# Altium PCB MechanicalLayout-LogitechG502.pcbdoc
Units mil, origin at the board's own origin, x right, y up, seen from the top; angles counter-clockwise.
Board outline 3690.8 x 4200.6 mil, 2 copper layers (Top Layer, Bottom Layer), stack 2.8 mil thick; 13 components, 1 nets, 73 pads, 117 vias.
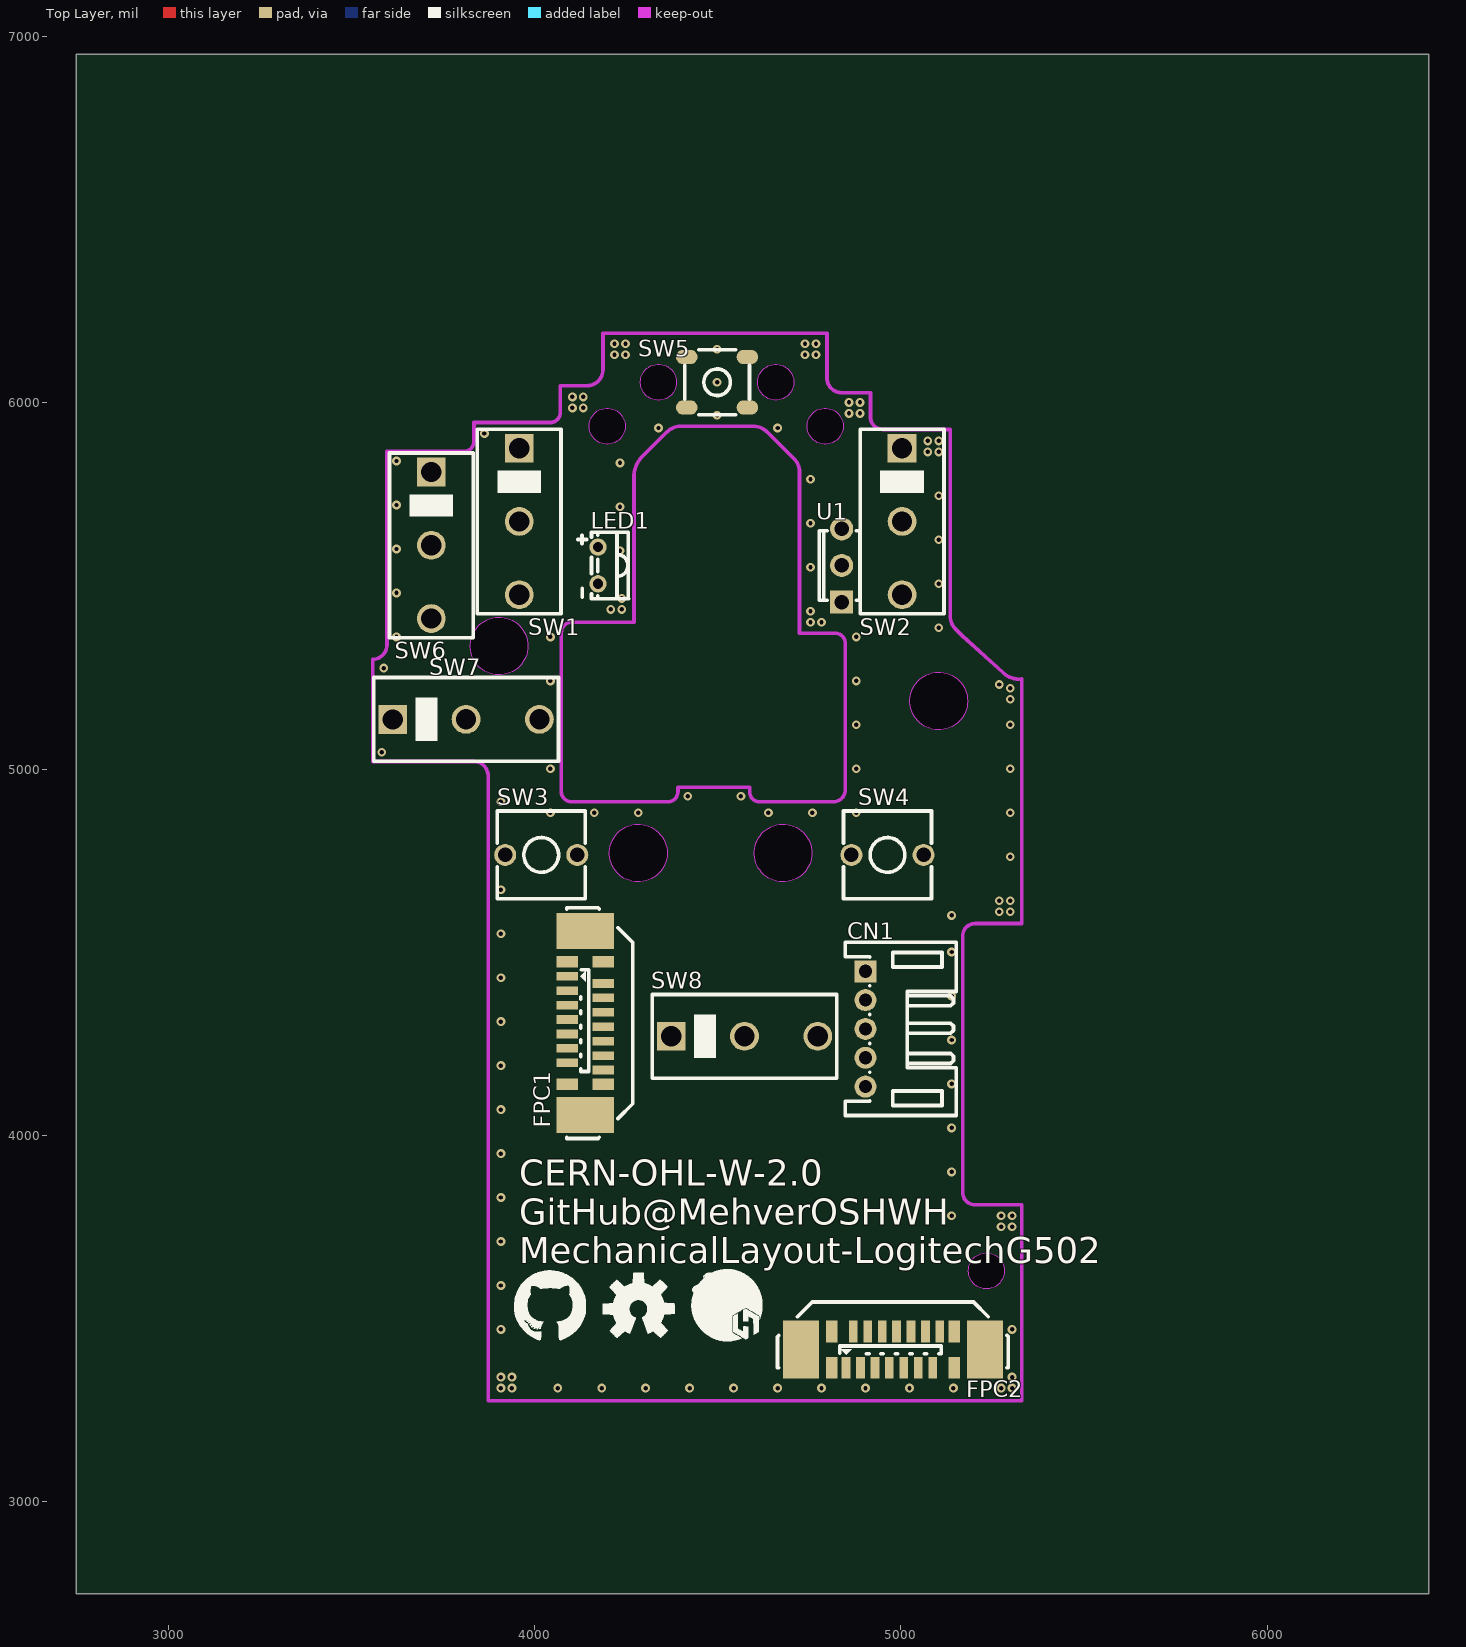
[diagram p0: Top Layer view]
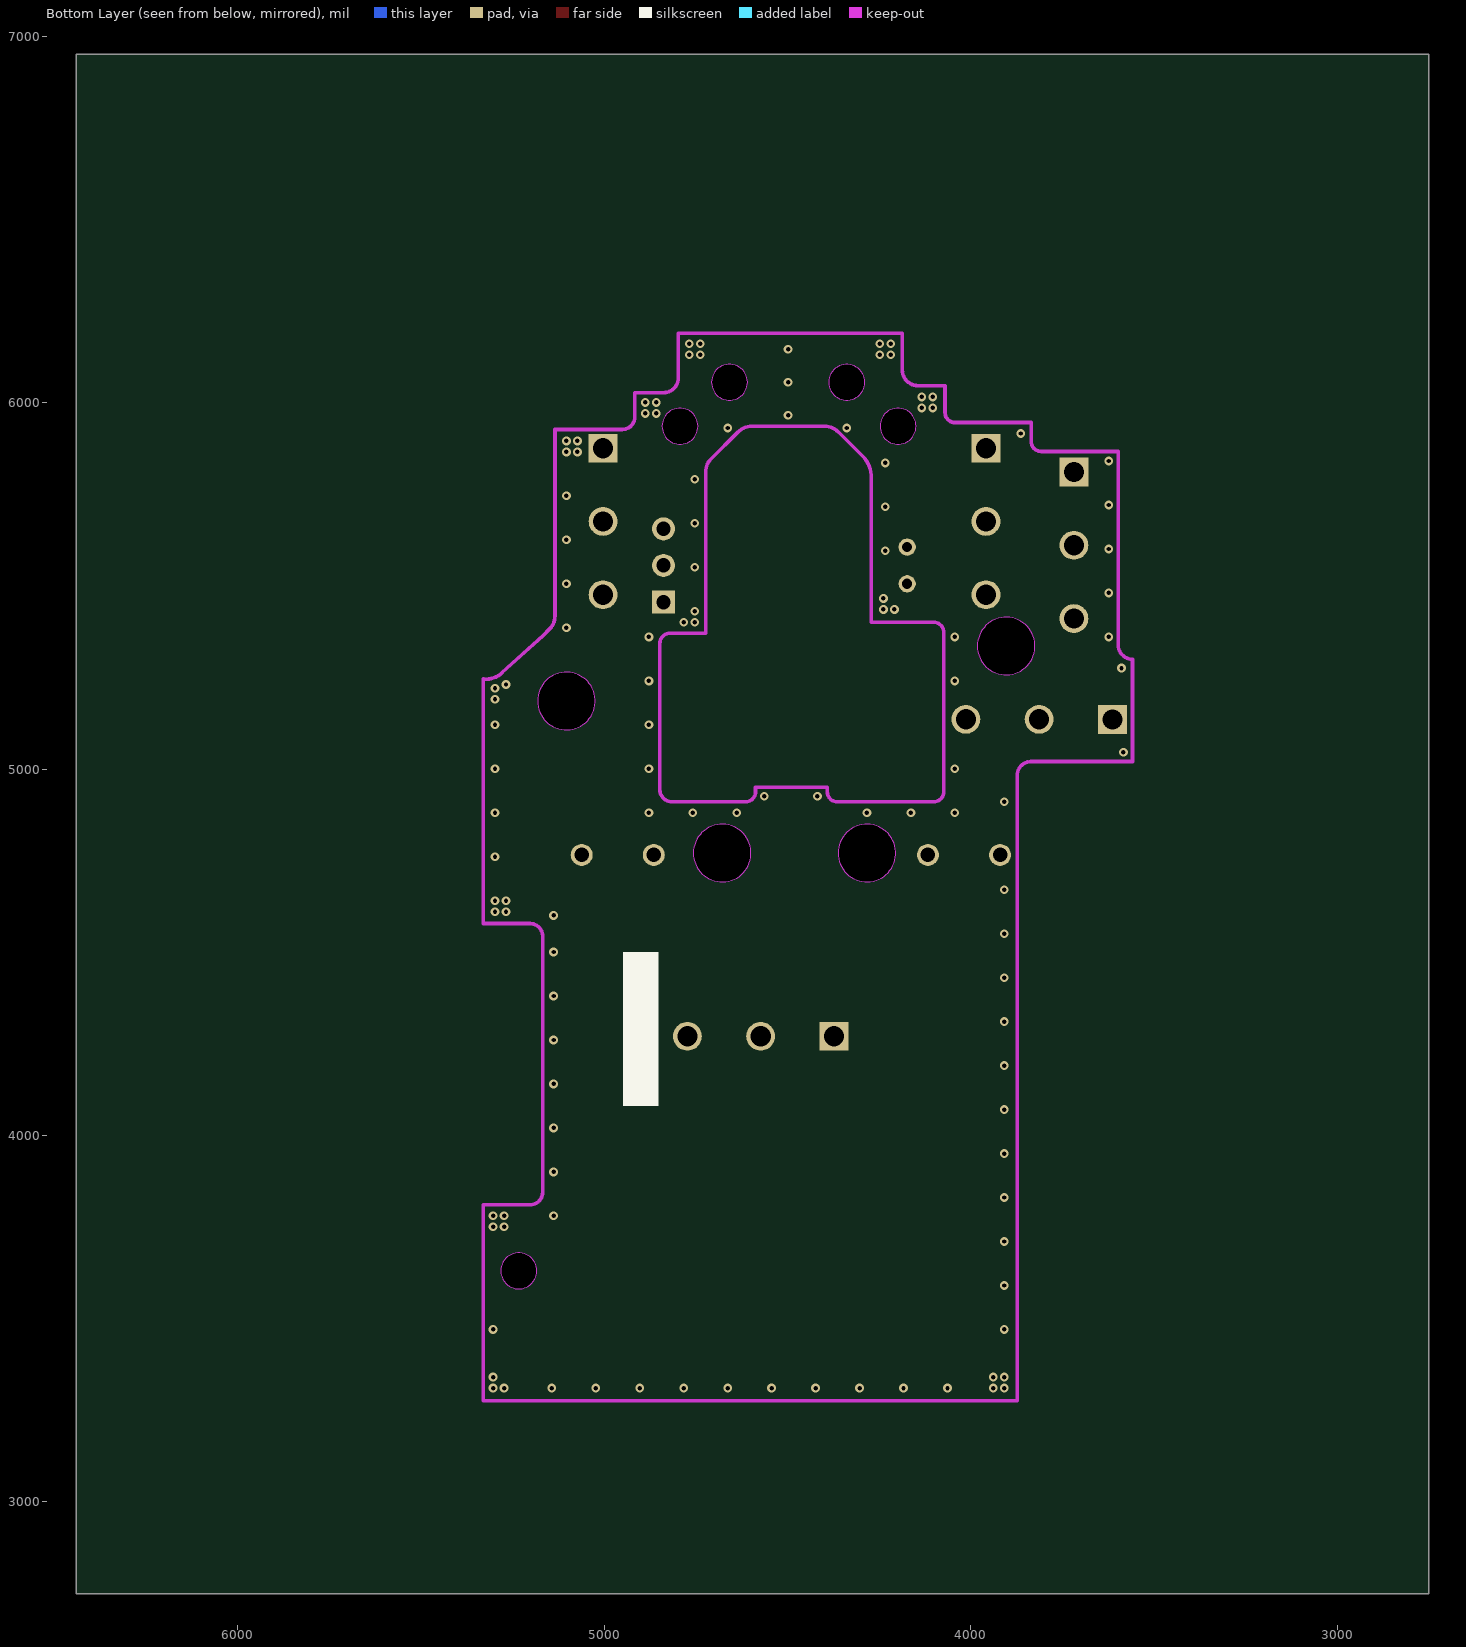
[diagram p1: Bottom Layer view, seen from below]

## Layer stack, top to bottom
Top Solder Mask Layer: solder mask 0.4, Dk 3.3
Top Layer: signal copper 1.4
Bottom Layer: signal copper 1.4
Bottom Solder Mask Layer: solder mask 0.4, Dk 3.3

## Board outline
6440.8,2750 2750,2750 2750,6950.6 6440.8,6950.6
cut-out: 3982.2,5335.9 3981.8,5328.1 3980.7,5320.3 3978.7,5312.7 3976,5305.3 3972.6,5298.2 3968.5,5291.6 3963.8,5285.3 3958.5,5279.5 3952.6,5274.3 3946.2,5269.8 3939.4,5265.8 3932.3,5262.6 3924.8,5260.1 3917.2,5258.4 3909.4,5257.4 3901.5,5257.2 3893.7,5257.8 3886,5259.1 3878.4,5261.3 3871.1,5264.1 3864.1,5267.7 3857.5,5272 3851.4,5276.9 3845.8,5282.4 3840.7,5288.4 3836.3,5294.8 3832.5,5301.7 3829.5,5309 3827.2,5316.5 3825.6,5324.2 3824.8,5332 3824.8,5339.8 3825.6,5347.6 3827.2,5355.3 3829.5,5362.8 3832.5,5370.1 3836.3,5377 3840.7,5383.5 3845.8,5389.5 3851.4,5394.9 3857.5,5399.8 3864.1,5404.1 3871.1,5407.7 3878.4,5410.5 3886,5412.7 3893.7,5414 3901.5,5414.6 3909.4,5414.4 3917.2,5413.5 3924.8,5411.7 3932.3,5409.2 3939.4,5406 3946.2,5402.1 3952.6,5397.5 3958.5,5392.3 3963.8,5386.5 3968.5,5380.3 3972.6,5373.6 3976,5366.5 3978.7,5359.1 3980.7,5351.5 3981.8,5343.7
cut-out: 4362.2,4770.9 4361.8,4763.1 4360.7,4755.3 4358.7,4747.7 4356,4740.3 4352.6,4733.2 4348.5,4726.6 4343.8,4720.3 4338.5,4714.5 4332.6,4709.3 4326.2,4704.8 4319.4,4700.8 4312.3,4697.6 4304.8,4695.1 4297.2,4693.4 4289.4,4692.4 4281.5,4692.2 4273.7,4692.8 4266,4694.1 4258.4,4696.3 4251.1,4699.1 4244.1,4702.7 4237.5,4707 4231.4,4711.9 4225.8,4717.4 4220.7,4723.4 4216.3,4729.8 4212.5,4736.7 4209.5,4744 4207.2,4751.5 4205.6,4759.2 4204.8,4767 4204.8,4774.8 4205.6,4782.6 4207.2,4790.3 4209.5,4797.8 4212.5,4805.1 4216.3,4812 4220.7,4818.5 4225.8,4824.5 4231.4,4829.9 4237.5,4834.8 4244.1,4839.1 4251.1,4842.7 4258.4,4845.5 4266,4847.7 4273.7,4849 4281.5,4849.6 4289.4,4849.4 4297.2,4848.5 4304.8,4846.7 4312.3,4844.2 4319.4,4841 4326.2,4837.1 4332.6,4832.5 4338.5,4827.3 4343.8,4821.5 4348.5,4815.3 4352.6,4808.6 4356,4801.5 4358.7,4794.1 4360.7,4786.5 4361.8,4778.7
cut-out: 4757.2,4770.9 4756.8,4763.1 4755.7,4755.3 4753.7,4747.7 4751,4740.3 4747.6,4733.2 4743.5,4726.6 4738.8,4720.3 4733.5,4714.5 4727.6,4709.3 4721.2,4704.8 4714.4,4700.8 4707.3,4697.6 4699.8,4695.1 4692.2,4693.4 4684.4,4692.4 4676.5,4692.2 4668.7,4692.8 4661,4694.1 4653.4,4696.3 4646.1,4699.1 4639.1,4702.7 4632.5,4707 4626.4,4711.9 4620.8,4717.4 4615.7,4723.4 4611.3,4729.8 4607.5,4736.7 4604.5,4744 4602.2,4751.5 4600.6,4759.2 4599.8,4767 4599.8,4774.8 4600.6,4782.6 4602.2,4790.3 4604.5,4797.8 4607.5,4805.1 4611.3,4812 4615.7,4818.5 4620.8,4824.5 4626.4,4829.9 4632.5,4834.8 4639.1,4839.1 4646.1,4842.7 4653.4,4845.5 4661,4847.7 4668.7,4849 4676.5,4849.6 4684.4,4849.4 4692.2,4848.5 4699.8,4846.7 4707.3,4844.2 4714.4,4841 4721.2,4837.1 4727.6,4832.5 4733.5,4827.3 4738.8,4821.5 4743.5,4815.3 4747.6,4808.6 4751,4801.5 4753.7,4794.1 4755.7,4786.5 4756.8,4778.7
cut-out: 5182.2,5185.9 5181.8,5178.1 5180.7,5170.3 5178.7,5162.7 5176,5155.3 5172.6,5148.2 5168.5,5141.6 5163.8,5135.3 5158.5,5129.5 5152.6,5124.3 5146.2,5119.8 5139.4,5115.8 5132.3,5112.6 5124.8,5110.1 5117.2,5108.4 5109.4,5107.4 5101.5,5107.2 5093.7,5107.8 5086,5109.1 5078.4,5111.3 5071.1,5114.1 5064.1,5117.7 5057.5,5122 5051.4,5126.9 5045.8,5132.4 5040.7,5138.4 5036.3,5144.8 5032.5,5151.7 5029.5,5159 5027.2,5166.5 5025.6,5174.2 5024.8,5182 5024.8,5189.8 5025.6,5197.6 5027.2,5205.3 5029.5,5212.8 5032.5,5220.1 5036.3,5227 5040.7,5233.5 5045.8,5239.5 5051.4,5244.9 5057.5,5249.8 5064.1,5254.1 5071.1,5257.7 5078.4,5260.5 5086,5262.7 5093.7,5264 5101.5,5264.6 5109.4,5264.4 5117.2,5263.5 5124.8,5261.7 5132.3,5259.2 5139.4,5256 5146.2,5252.1 5152.6,5247.5 5158.5,5242.3 5163.8,5236.5 5168.5,5230.3 5172.6,5223.6 5176,5216.5 5178.7,5209.1 5180.7,5201.5 5181.8,5193.7
cut-out: 4247.7,5935.9 4247.3,5929.7 4246.2,5923.7 4244.2,5917.8 4241.6,5912.2 4238.3,5907 4234.4,5902.2 4229.9,5898 4224.9,5894.4 4219.4,5891.4 4213.7,5889.1 4207.7,5887.6 4201.6,5886.8 4195.4,5886.8 4189.3,5887.6 4183.3,5889.1 4177.5,5891.4 4172.1,5894.4 4167.1,5898 4162.6,5902.2 4158.7,5907 4155.4,5912.2 4152.7,5917.8 4150.8,5923.7 4149.7,5929.7 4149.3,5935.9 4149.7,5942.1 4150.8,5948.1 4152.7,5954 4155.4,5959.6 4158.7,5964.8 4162.6,5969.6 4167.1,5973.8 4172.1,5977.5 4177.5,5980.4 4183.3,5982.7 4189.3,5984.2 4195.4,5985 4201.6,5985 4207.7,5984.2 4213.7,5982.7 4219.4,5980.4 4224.9,5977.5 4229.9,5973.8 4234.4,5969.6 4238.3,5964.8 4241.6,5959.6 4244.2,5954 4246.2,5948.1 4247.3,5942.1
cut-out: 4387.7,6055.9 4387.3,6049.7 4386.2,6043.7 4384.2,6037.8 4381.6,6032.2 4378.3,6027 4374.4,6022.2 4369.9,6018 4364.9,6014.4 4359.4,6011.4 4353.7,6009.1 4347.7,6007.6 4341.6,6006.8 4335.4,6006.8 4329.3,6007.6 4323.3,6009.1 4317.5,6011.4 4312.1,6014.4 4307.1,6018 4302.6,6022.2 4298.7,6027 4295.4,6032.2 4292.7,6037.8 4290.8,6043.7 4289.7,6049.7 4289.3,6055.9 4289.7,6062.1 4290.8,6068.1 4292.7,6074 4295.4,6079.6 4298.7,6084.8 4302.6,6089.6 4307.1,6093.8 4312.1,6097.5 4317.5,6100.4 4323.3,6102.7 4329.3,6104.2 4335.4,6105 4341.6,6105 4347.7,6104.2 4353.7,6102.7 4359.4,6100.4 4364.9,6097.5 4369.9,6093.8 4374.4,6089.6 4378.3,6084.8 4381.6,6079.6 4384.2,6074 4386.2,6068.1 4387.3,6062.1
cut-out: 4707.7,6055.9 4707.3,6049.7 4706.2,6043.7 4704.2,6037.8 4701.6,6032.2 4698.3,6027 4694.4,6022.2 4689.9,6018 4684.9,6014.4 4679.4,6011.4 4673.7,6009.1 4667.7,6007.6 4661.6,6006.8 4655.4,6006.8 4649.3,6007.6 4643.3,6009.1 4637.5,6011.4 4632.1,6014.4 4627.1,6018 4622.6,6022.2 4618.7,6027 4615.4,6032.2 4612.7,6037.8 4610.8,6043.7 4609.7,6049.7 4609.3,6055.9 4609.7,6062.1 4610.8,6068.1 4612.7,6074 4615.4,6079.6 4618.7,6084.8 4622.6,6089.6 4627.1,6093.8 4632.1,6097.5 4637.5,6100.4 4643.3,6102.7 4649.3,6104.2 4655.4,6105 4661.6,6105 4667.7,6104.2 4673.7,6102.7 4679.4,6100.4 4684.9,6097.5 4689.9,6093.8 4694.4,6089.6 4698.3,6084.8 4701.6,6079.6 4704.2,6074 4706.2,6068.1 4707.3,6062.1
cut-out: 4842.7,5935.9 4842.3,5929.7 4841.2,5923.7 4839.2,5917.8 4836.6,5912.2 4833.3,5907 4829.4,5902.2 4824.9,5898 4819.9,5894.4 4814.4,5891.4 4808.7,5889.1 4802.7,5887.6 4796.6,5886.8 4790.4,5886.8 4784.3,5887.6 4778.3,5889.1 4772.5,5891.4 4767.1,5894.4 4762.1,5898 4757.6,5902.2 4753.7,5907 4750.4,5912.2 4747.7,5917.8 4745.8,5923.7 4744.7,5929.7 4744.3,5935.9 4744.7,5942.1 4745.8,5948.1 4747.7,5954 4750.4,5959.6 4753.7,5964.8 4757.6,5969.6 4762.1,5973.8 4767.1,5977.5 4772.5,5980.4 4778.3,5982.7 4784.3,5984.2 4790.4,5985 4796.6,5985 4802.7,5984.2 4808.7,5982.7 4814.4,5980.4 4819.9,5977.5 4824.9,5973.8 4829.4,5969.6 4833.3,5964.8 4836.6,5959.6 4839.2,5954 4841.2,5948.1 4842.3,5942.1
cut-out: 5282.7,3630.9 5282.3,3624.7 5281.2,3618.7 5279.2,3612.8 5276.6,3607.2 5273.3,3602 5269.4,3597.2 5264.9,3593 5259.9,3589.4 5254.4,3586.4 5248.7,3584.1 5242.7,3582.6 5236.6,3581.8 5230.4,3581.8 5224.3,3582.6 5218.3,3584.1 5212.5,3586.4 5207.1,3589.4 5202.1,3593 5197.6,3597.2 5193.7,3602 5190.4,3607.2 5187.7,3612.8 5185.8,3618.7 5184.7,3624.7 5184.3,3630.9 5184.7,3637.1 5185.8,3643.1 5187.7,3649 5190.4,3654.6 5193.7,3659.8 5197.6,3664.6 5202.1,3668.8 5207.1,3672.5 5212.5,3675.4 5218.3,3677.7 5224.3,3679.2 5230.4,3680 5236.6,3680 5242.7,3679.2 5248.7,3677.7 5254.4,3675.4 5259.9,3672.5 5264.9,3668.8 5269.4,3664.6 5273.3,3659.8 5276.6,3654.6 5279.2,3649 5281.2,3643.1 5282.3,3637.1

## Design rules (kind name [scope] priority, off if disabled: settings)
BoardOutlineClearance Default [All] p0: genericclearance=10 ignorepadtopadclearanceinfootprint=FALSE except(0: Arc-SplitContinuation Track-SplitContinuation SMDPad-SplitContinuation THPad-SplitContinuation Via-SplitContinuation Fill-SplitContinuation Poly-SplitContinuation Region-SplitContinuation Text-SplitContinuation)
BoardOutlineClearance otherClearance [All] p0: genericclearance=10 ignorepadtopadclearanceinfootprint=FALSE except(0: Arc-SplitContinuation Track-SplitContinuation SMDPad-SplitContinuation THPad-SplitContinuation Via-SplitContinuation Fill-SplitContinuation Poly-SplitContinuation Region-SplitContinuation Text-SplitContinuation)
Clearance Default [All] p1: gap=7 ignorepadtopadclearanceinfootprint=FALSE
Clearance otherClearance [All] p1: gap=7 ignorepadtopadclearanceinfootprint=FALSE
DiffPairsRouting differentialPair [All] p1: maxuncoupledlength=10 minlimit=5 maxlimit=Infinity mostfreqgap=6 toplayer_minwidth=5 toplayer_prefwidth=100 toplayer_maxwidth=100 bottomlayer_minwidth=5 bottomlayer_prefwidth=100 bottomlayer_maxwidth=100
PasteMaskExpansion pasteMaskExpansion [All] p1: expansion=0
PlaneConnect innerPlane [All] p1: planeconnectstyle=Relief reliefexpansion=20 reliefentries=4 reliefconductorwidth=10 reliefairgap=10
PolygonConnect copperRegion [All] p1: connectstyle=Relief reliefentries=4 reliefconductorwidth=10 polygonreliefangle="90 Angle" airgapwidth=10
RoutingVias Default [All] p1: viastyle="Through Hole" holewidth=12 minholewidth=12 maxholewidth=1181 width=12 minwidth=12 maxwidth=1181
SolderMaskExpansion Common [IsVia] p1: useseparateexpansions=TRUE expansion=-1000 expansionbottom=-1000
SolderMaskExpansion Common [All] p2: useseparateexpansions=TRUE expansion=2 expansionbottom=2
Width Default [All] p1: maxlimit=1000 minlimit=10 preferedwidth=10

## Components (designator, comment, footprint, x,y, rotation, side; value= is the part's Value field where it differs from the comment)
CN1 "PH-5AWD" CONN-TH_5P-P2.00_PH-5AWD 4903.5,4290.9 r270 top
FPC1 "FPC-0.5AZD2-14PLCR5-H42" FPC-SMD_14P-P1.00_FPC-0.5AZD2-14PLCR5-H42#1 4138.5,4306.9 r270 top
FPC2 "FPC-0.5AZD2-14PLCR5-H42" FPC-SMD_14P-P1.00_FPC-0.5AZD2-14PLCR5-H42#2 4978.5,3415.9 r0 top
LED1 "XL-IR928-6C" LED-TH_L4.6-W2.5-P2.54_IR928-6C 4173.5,5555.9 r90 top
SW1 "D2F-F" SW-TH_D2F-F#1 3958.5,5675.9 r270 top
SW2 "D2F-F" SW-TH_D2F-F#1 5003.5,5675.9 r270 top
SW3 "HX TS6673Z2J JYSB" SW-TH_L6.2-W6.2-P5.00 4018.5,4765.9 r0 top
SW4 "HX TS6673Z2J JYSB" SW-TH_L6.2-W6.2-P5.00 4963.5,4765.9 r0 top
SW5 "K2-1824SR-B4SW-06" SW-SMD_4P-L4.5-W4.5-P3.50-LS5.0 4498.5,6055.9 r0 top
SW6 "D2F-F" SW-TH_D2F-F#1 3718.5,5610.9 r270 top
SW7 "D2F-F" SW-TH_D2F-F#2 3813.5,5135.9 r0 top
SW8 "D2F-F" SW-TH_D2F-F#3 4573.4,4271 r0 top
U1 "PT2559B/L2/H2(A5)" OPTO-TH_3P_PT2559B 4838.5,5555.9 r90 top

## Footprints (in the part's own frame and the unit in brackets; to place one, negate y for a bottom-side part, rotate by r counter-clockwise, add the part's x,y. Pads: shape width x height; smd on the part's side, far side on the other; paste and mask are expansions set on the pad)
CONN-TH_5P-P2.00_PH-5AWD [mil]
  rect 60x60 hole 36: 1(-157.5,0)
  round 60 hole 36: 2(-78.8,0) 3(-0.1,0) 4(78.6,0) 5(157.4,0)
  silkscreen extent -236,-55 236,248
FPC-SMD_14P-P1.00_FPC-0.5AZD2-14PLCR5-H42#1 [mil]
  rect 23.6x59.1 smd paste+0 mask+2: 1(-127.9,-49.2) 2(-108.2,49.2) 3(-88.5,-49.2) 4(-68.9,49.2) 5(-49.2,-49.2) 6(-29.5,49.2) 7(-9.8,-49.2) 8(9.9,49.2) 9(29.6,-49.2) 10(49.3,49.2) 11(68.9,-49.2) 12(88.6,49.2) 13(108.3,-49.2) 14(128,49.2)
  rect 31.5x59.1 smd paste+0 mask+2: 15(167.4,49.2) 16(167.4,-49.2) 17(-167.3,49.2) 18(-167.3,-49.2)
  rect 98.4x157.5 smd paste+0 mask+2: 15(251.3,0) 17(-251.2,0)
  silkscreen extent -315,-50 315,130
FPC-SMD_14P-P1.00_FPC-0.5AZD2-14PLCR5-H42#2 [mil]
  rect 23.6x59.1 smd paste+0 mask+2: 1(-128,-49.2) 2(-108.3,49.2) 3(-88.6,-49.2) 4(-68.9,49.2) 5(-49.2,-49.2) 6(-29.5,49.2) 7(-9.9,-49.2) 8(9.8,49.2) 9(29.5,-49.2) 10(49.2,49.2) 11(68.9,-49.2) 12(88.6,49.2) 13(108.2,-49.2) 14(127.9,49.2)
  rect 31.5x59.1 smd paste+0 mask+2: 15(167.3,49.2) 16(167.3,-49.2) 17(-167.3,49.2) 18(-167.3,-49.2)
  rect 98.4x157.5 smd paste+0 mask+2: 15(251.2,0) 17(-251.2,0)
  silkscreen extent -315,-50 315,130
LED-TH_L4.6-W2.5-P2.54_IR928-6C [mil]
  round 47.2 hole 27.6: 1(-50,0) 2(50,0)
  silkscreen extent -90,-83 91,55
OPTO-TH_3P_PT2559B [mil]
  rect 63x63 hole 39.4: 1(-100,0)
  round 63 hole 39.4: 2(0,0) 3(100,0)
  silkscreen extent -94,-49 94,61
SW-SMD_4P-L4.5-W4.5-P3.50-LS5.0 [mil]
  oval 59.1x39.4 smd: 1(-82.7,68.9) 2(82.7,68.9) 3(-82.7,-68.9) 4(82.7,-68.9)
  silkscreen extent -89,-89 89,89
SW-TH_D2F-F#1 [mil]
  rect 78.7x78.7 hole 55.1: 1(-200,-0.1)
  round 78.7 hole 55.1: 2(-0.1,0) 3(199.9,0)
  silkscreen extent -252,-114 252,114
SW-TH_D2F-F#2 [mil]
  rect 78.7x78.7 hole 55.1: 1(-200,0)
  round 78.7 hole 55.1: 2(-0.1,0.1) 3(199.9,0.1)
  silkscreen extent -252,-114 252,114
SW-TH_D2F-F#3 [mil]
  rect 78.7x78.7 hole 55.1: 1(-199.9,-0.1)
  round 78.7 hole 55.1: 2(0,0) 3(200,0)
  silkscreen extent -252,-114 252,114
SW-TH_L6.2-W6.2-P5.00 [mil]
  round 60 hole 39.4: 1(-98.4,0) 2(98.4,0)
  silkscreen extent -120,-120 120,120

## Via types
v1: diameter 24, hole 12, Top Layer to Bottom Layer, 117 vias

## Nets (pads, with @x,y where several pads share a name; then routed paths per layer and width w, separated by ;. In a path a pad name is that pad's centre, name@x,y a point inside that pad or via, vN(x,y) a via of type N, cw(c..) or ccw(c..) an arc to the next point about the centre after c; other vN are vias at no path point)
GND: 
  other v1: 3908.5,3310.9 3938.5,3310.9 4063.5,3310.9 4183.5,3310.9 4303.5,3310.9 4423.5,3310.9 4543.5,3310.9 4663.5,3310.9 4783.5,3310.9 4903.5,3310.9 5023.5,3310.9 5143.5,3310.9 5273.5,3310.9 5303.5,3310.9 3908.5,3340.9 3938.5,3340.9 5303.5,3340.9 3908.5,3470.9 5303.5,3470.9 3908.5,3590.9 3908.5,3710.9 5273.5,3750.9 5303.5,3750.9 5138.5,3780.9 5273.5,3780.9 5303.5,3780.9 3908.5,3830.9 5138.5,3900.9 3908.5,3950.9 5138.5,4020.9 3908.5,4070.9 5138.5,4140.9 3908.5,4190.9 5138.5,4260.9 3908.5,4310.9 5138.5,4380.9 3908.5,4430.9 5138.5,4500.9 3908.5,4550.9 5138.5,4600.9 5268.5,4610.9 5298.5,4610.9 5268.5,4640.9 5298.5,4640.9 3908.5,4670.9 5298.5,4760.9 4043.5,4880.9 4163.5,4880.9 4283.5,4880.9 4638.5,4880.9 4758.5,4880.9 4878.5,4880.9 5298.5,4880.9 3908.5,4910.9 4418.5,4925.9 4563.5,4925.9 4043.5,5000.9 4878.5,5000.9 5298.5,5000.9 3583.5,5045.9 4878.5,5120.9 5298.5,5120.9 5298.5,5190.9 5298.5,5220.9 5268.5,5230.9 4043.5,5240.9 4878.5,5240.9 3588.5,5275.9 3623.5,5360.9 4043.5,5360.9 4878.5,5360.9 5103.5,5385.9 4753.5,5400.9 4783.5,5400.9 4753.5,5430.9 4208.5,5435.9 4238.5,5435.9 4238.5,5465.9 3623.5,5480.9 5103.5,5505.9 4753.5,5550.9 4233.5,5595.9 3623.5,5600.9 5103.5,5625.9 4753.5,5670.9 4233.5,5715.9 3623.5,5720.9 5103.5,5745.9 4753.5,5790.9 4233.5,5835.9 3623.5,5840.9 5073.5,5865.9 5103.5,5865.9 5073.5,5895.9 5103.5,5895.9 3863.5,5915.9 4338.5,5930.9 4663.5,5930.9 4498.5,5965.9 4858.5,5970.9 4888.5,5970.9 4103.5,5985.9 4133.5,5985.9 4858.5,6000.9 4888.5,6000.9 4103.5,6015.9 4133.5,6015.9 4498.5,6055.9 4218.5,6130.9 4248.5,6130.9 4738.5,6130.9 4768.5,6130.9 4498.5,6145.9 4218.5,6160.9 4248.5,6160.9 4738.5,6160.9 4768.5,6160.9
pads on no net: CN1.1 CN1.2 CN1.3 CN1.4 CN1.5 FPC1.1 FPC1.2 FPC1.3 FPC1.4 FPC1.5 FPC1.6 FPC1.7 FPC1.8 FPC1.9 FPC1.10 FPC1.11 FPC1.12 FPC1.13 FPC1.14 FPC1.15 FPC1.16 FPC1.17 FPC1.18 FPC2.1 FPC2.2 FPC2.3 FPC2.4 FPC2.5 FPC2.6 FPC2.7 FPC2.8 FPC2.9 FPC2.10 FPC2.11 FPC2.12 FPC2.13 FPC2.14 FPC2.15 FPC2.16 FPC2.17 FPC2.18 LED1.1 LED1.2 SW1.1 SW1.2 SW1.3 SW2.1 SW2.2 SW2.3 SW3.1 SW3.2 SW4.1 SW4.2 SW5.1 SW5.2 SW5.3 SW5.4 SW6.1 SW6.2 SW6.3 SW7.1 SW7.2 SW7.3 SW8.1 SW8.2 SW8.3 U1.1 U1.2 U1.3

## Polygon pours and split planes (outlines as drawn)
GND on Bottom Layer (solid, remove dead copper, pour order 6): 3328.5,3120.9 3328.5,6335.9 5548.5,6335.9 5548.5,3120.9
GND on Top Layer (solid, remove dead copper, pour order 2): 3328.5,3120.9 3328.5,6335.9 5548.5,6335.9 5548.5,3120.9

## Keep-outs
Board Outline Layer:
  drawing of 778 lines, arcs and shapes, not listed

## Silkscreen, mask and mechanical layers (free items; w line width, h text height)
Top Silkscreen Layer:
  drawing of 11 lines, arcs and shapes, not listed
  text "CERN-OHL-W-2.0 / GitHub@MehverOSHWH / MechanicalLayout-LogitechG502" at 3958.5,3650.9 h70.9
Bottom Silkscreen Layer:
  region: 4853.5,4500.9 4853.5,4080.9 4948.5,4080.9 4948.5,4500.9
Mechanical Layer:
  drawing of 502 lines, arcs and shapes, not listed

## Dimensions
3558.5,6229.7 to 4188.4,6229.7 on Document Layer
3501.7,6185.9 to 3501.7,6048.1 on Document Layer
5328.5,6228.3 to 4797,6228.3 on Document Layer
5637,6185.9 to 5637,6028.4 on Document Layer
4798.5,6006.2 to 4916.6,6006.2 on Document Layer
4918.5,5992.2 to 5135,5992.2 on Document Layer
3222.3,5870.9 to 3222.3,5300 on Document Layer
3805,5945.9 to 3805,5867.2 on Document Layer
3833.5,5973.9 to 3597.3,5973.9 on Document Layer
4073.5,5973.9 to 3837.3,5973.9 on Document Layer
3512.5,6045.9 to 3512.5,5947.5 on Document Layer
4188.5,6095.6 to 4070.4,6095.6 on Document Layer
5567.7,5925.9 to 5567.7,5394.4 on Document Layer
3558.5,3222.4 to 3893.1,3222.4 on Document Layer
3000,5020.9 to 3000,5316.2 on Document Layer
3406.9,5865.9 to 3406.9,5019.4 on Document Layer
3873.5,3114.7 to 5333.5,3114.7 on Document Layer
3558.5,4835.4 to 3873.4,4835.4 on Document Layer
3558.5,5084.4 to 5330.1,5084.4 on Document Layer
5328.5,3784.3 to 5171,3784.3 on Document Layer
5618.9,3810.9 to 5618.9,4578.6 on Document Layer
5410.9,3275.9 to 5410.9,3807.4 on Document Layer
3598.5,5985.3 to 4287.5,5985.3 on Document Layer
5133.5,5873.4 to 4720.1,5873.4 on Document Layer
4774.6,6190.9 to 4774.6,5935 on Document Layer
4235,5935.9 to 4235,5837.5 on Document Layer
4288.5,5961.2 to 4386.9,5961.2 on Document Layer
4152.9,4910.9 to 4152.9,5391.2 on Document Layer
5742,4910.9 to 5742,5363.7 on Document Layer
3558.5,6700.6 to 4090,6700.6 on Document Layer
5333.5,6698.7 to 4841.4,6698.7 on Document Layer
3483.4,5935.9 to 3483.4,4912.3 on Document Layer
4175.1,4910.9 to 4175.1,4950.3 on Document Layer
4588.5,4653.5 to 4391.6,4653.5 on Document Layer
4843.5,4961.4 to 4587.6,4961.4 on Document Layer
4843.5,5379.7 to 5012.8,5379.7 on Document Layer
4088.5,4989.2 to 4009.7,4989.2 on Document Layer
5168.5,3000 to 4322,3000 on Document Layer
5735.8,3280.9 to 5735.8,4383.3 on Document Layer
5433.5,4910.9 to 5433.5,5351.9 on Document Layer
5759.1,6025.9 to 5759.1,5927.5 on Document Layer
4718.5,5505.9 to 4278.5,5505.9 on Document Layer